# Altium PCB MezzanineBreakout.PcbDoc
Units mil, origin at the board's own origin, x right, y up, seen from the top; angles counter-clockwise.
Board outline 600 x 950 mil, 2 copper layers (Top Layer, Bottom Layer); 1 components, 50 nets, 104 pads, 26 vias.
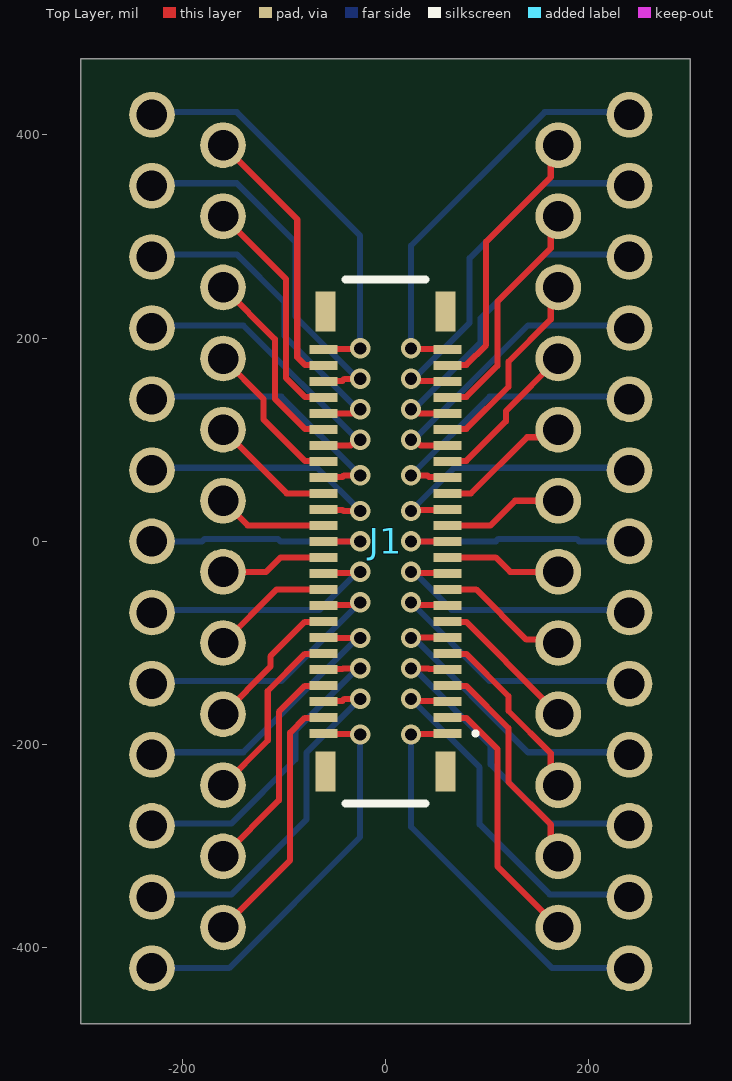
[diagram p0: Top Layer view]
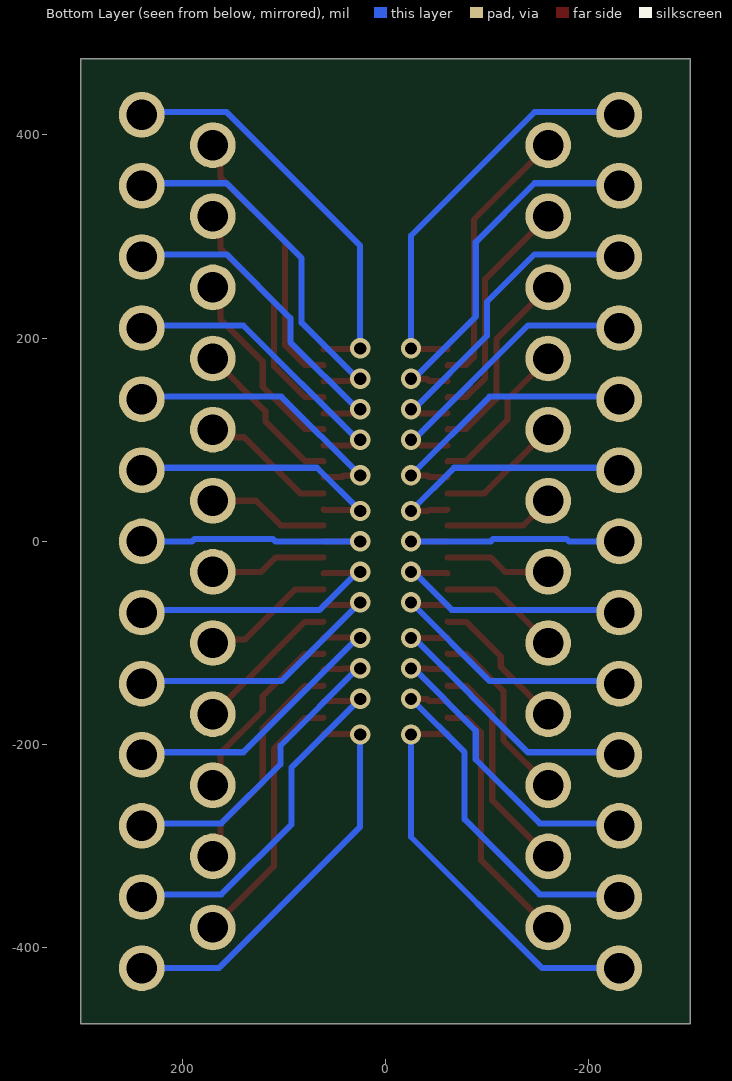
[diagram p1: Bottom Layer view, seen from below]

## Layer stack, top to bottom
Top Solder: solder mask 0.4, Solder Resist, Dk 3.5
Top Layer: signal copper 1.4
Dielectric 1: dielectric 12.6, FR-4, Dk 4.8
Bottom Layer: signal copper 1.4
Bottom Solder: solder mask 0.4, Solder Resist, Dk 3.5

## Board outline
-300,-475 -300,475 300,475 300,-475

## Design rules (kind name [scope] priority, off if disabled: settings)
Clearance [All] p1: gap=10 ignorepadtopadclearanceinfootprint=FALSE except(0: Arc-Hole Track-Hole SMDPad-Hole THPad-Hole Via-Hole Fill-Hole Poly-Hole Region-Hole Text-Hole; 5: Arc-Arc Arc-Track Track-Track SMDPad-SMDPad; 7: Arc-THPad Track-THPad; 8: Arc-SMDPad Track-SMDPad; 20: SMDPad-THPad)
HoleSize [All] p1: absolutevalues=TRUE maxlimit=248.03 minlimit=0.98 maxpercent=80.000 minpercent=20.000
MinimumSolderMaskSliver [All] p1: minsoldermaskwidth=3.15
PlaneClearance [All] p1: clearance=5
PlaneConnect [All] p1: planeconnectstyle=Direct reliefexpansion=20 reliefentries=4 reliefconductorwidth=10 reliefairgap=10
PolygonConnect PolygonConnect_5V [InNet('+5')] p1: connectstyle=Direct reliefconductorwidth=10 reliefentries=4 polygonreliefangle="90 Angle" airgapwidth=10
PolygonConnect PolygonConnect_VCC [InNet('VCC')] p2: connectstyle=Direct reliefconductorwidth=10 reliefentries=4 polygonreliefangle="90 Angle" airgapwidth=10
PolygonConnect PolygonConnect_GND [InNet('GND')] p3: thpad.connectstyle=Direct thpad.reliefconductorwidth=10 thpad.reliefentries=4 thpad.polygonreliefangle="90 Angle" thpad.airgapwidth=10 smdpad.connectstyle=Relief smdpad.reliefconductorwidth=10 smdpad.reliefentries=4 smdpad.polygonreliefangle="90 Angle" smdpad.airgapwidth=10 via.connectstyle=Direct via.reliefconductorwidth=10 via.reliefentries=4 via.polygonreliefangle="90 Angle" via.airgapwidth=10
PolygonConnect [All] p4: connectstyle=Relief reliefconductorwidth=10 reliefentries=4 polygonreliefangle="90 Angle" airgapwidth=10
RoutingVias [All] p1: holewidth=28 width=50 viastyle="Through Hole" minholewidth=12 minwidth=20 maxholewidth=28 maxwidth=50
SolderMaskExpansion SolderMaskExpansion_Connector [HasFootprint('501745-0501')] p1: expansion=3.7 istentingtop=FALSE
SolderMaskExpansion [All] p2: expansion=2 istentingtop=FALSE
Width [All] p1: maxlimit=100 minlimit=5 preferedwidth=10 minimp=50.000000 maximp=50.000000 favimp=50.000000
26 further rules are at their usual default settings.

## Components (designator, comment, footprint, x,y, rotation, side; value= is the part's Value field where it differs from the comment)
J1 "51338-1074" 51338-1074 0,0 r90 top

## Footprints (in the part's own frame and the unit in brackets; to place one, negate y for a bottom-side part, rotate by r counter-clockwise, add the part's x,y. Pads: shape width x height; smd on the part's side, far side on the other; paste and mask are expansions set on the pad)
51338-1074 [mm]
  rect 0.22x0.7 smd: 1(-4.8,-1.55) 2(-4.8,1.55) 3(-4.4,-1.55) 4(-4.4,1.55) 5(-4,-1.55) 6(-4,1.55) 7(-3.6,-1.55) 8(-3.6,1.55) 9(-3.2,-1.55) 10(-3.2,1.55) 11(-2.8,-1.55) 12(-2.8,1.55) 13(-2.4,-1.55) 14(-2.4,1.55) 15(-2,-1.55) 16(-2,1.55) 17(-1.6,-1.55) 18(-1.6,1.55) 19(-1.2,-1.55) 20(-1.2,1.55) 21(-0.8,-1.55) 22(-0.8,1.55) 23(-0.4,-1.55) 24(-0.4,1.55) 25(0,-1.55) 26(0,1.55) 27(0.4,-1.55) 28(0.4,1.55) 29(0.8,-1.55) 30(0.8,1.55) 31(1.2,-1.55) 32(1.2,1.55) 33(1.6,-1.55) 34(1.6,1.55) 35(2,-1.55) 36(2,1.55) 37(2.4,-1.55) 38(2.4,1.55) 39(2.8,-1.55) 40(2.8,1.55) 41(3.2,-1.55) 42(3.2,1.55) 43(3.6,-1.55) 44(3.6,1.55) 45(4,-1.55) 46(4,1.55) 47(4.4,-1.55) 48(4.4,1.55) 49(4.8,-1.55) 50(4.8,1.55)
  rect 1x0.5 smd: MP1(-5.75,-1.5) MP2(-5.75,1.5) MP3(5.75,-1.5) MP4(5.75,1.5)
  silkscreen extent -6.55,-2.3 6.55,1, body extent -6.55,-1.7 6.55,1.7, height 1.33

## Part data
J1: "Board Connector, 100 Contact(s), 2 Row(s), Female, Straight, 0.016 inch Pitch, Surface Mount Terminal, Locking, Black Insulator, Receptacle", Contact Resistance=40mR, Flammability Rating="UL94 V-0", Insulation Color=Black, Insulation Resistance=100MR, Manufacturer=Molex, Max Operating Temperature=85°C, Min Operating Temperature=-25°C, Rated Current (Signal)=300mA, Supplier Part Number=538-51338-1074, Board Mounting Option="FITTING NAIL", Body Breadth=0.134inch, Body Depth=0.053inch, Body Length=0.909inch, Body/Shell Style=RECEPTACLE, Category="Headers and Wire Housings", ComponentLink1Description=https://datasheet.ciiva.com:443/pdfs/VipMasterIC/IC/MOLE/MOLE-S-A0003536377/MOLE-S-A0003536377-1.pdf?src-supplier=IHS+Markit, ComponentLink1URL=https://datasheet.ciiva.com:443/pdfs/VipMasterIC/IC/MOLE/MOLE-S-A0003536377/MOLE-S-A0003536377-1.pdf?src-supplier=IHS+Markit, ComponentLink2Description=https://datasheet.ciiva.com/5129/0513381074-pcb-receptacles-149270-5129725.pdf?src-supplier=Mouser, ComponentLink2URL=https://datasheet.ciiva.com/5129/0513381074-pcb-receptacles-149270-5129725.pdf?src-supplier=Mouser, ComponentLink3Description=https://datasheet.ciiva.com/46409/1597556-46409754.pdf?src-supplier=Element14, ComponentLink3URL=https://datasheet.ciiva.com/46409/1597556-46409754.pdf?src-supplier=Element14, Connector Type="BOARD CONNECTOR", Contact Finish - Mating=GOLD, Contact Finish - Termination=GOLD, Contact Gender=Female, Contact Pattern=RECTANGULAR, DIN Conformance=No, Filter Feature=No, IEC Conformance=No, Insulation Material=Polymer, JESD-609 Code=e4, Manufacturer Part Number=51338-1074, Mating Contact Pitch=0.016inch, Mating Contact Row Spacing=0.043inch, Mating Information="MULTIPLE MATING PARTS AVAILABLE", MIL Conformance=No, Mixed Contacts=No, Mounting Option 1=LOCKING, Mounting Style=STRAIGHT, Mounting Technology=Board, Number Of Connectors=1, Number of Contacts=100, Number Of PCB Rows=2, Number of Rows Loaded=2, Option="General Purpose", PCB Contact Pattern=RECTANGULAR, PCB Contact Row Spacing=1.4986mm, Pricing="1=3.42, 10=3.08, 50=3.08, 100=2.57, 500=2.56, 1000=2.27, 10000=2.27 (USD)", Reach SVHC Compliant=Yes, Reference Standard=UL, Reliability=COMMERCIAL, RoHS=Yes, RoHS Compliant=Yes, Stock=1434, Supplier=Mouser, Terminal Pitch=0.4mm, Termination=SMD/SMT

## Free pads (board coordinates)
  round 45 hole 30: 1(240,-420) 2(-230,-420) 3(170,-380) 4(-160,-380) 5(240,-350) 6(-230,-350) 7(170,-310) 8(-160,-310) 9(240,-280) 10(-230,-280) 11(170,-240) 12(-160,-240) 13(240,-210) 14(-230,-210) 15(170,-170) 16(-160,-170) 17(240,-140) 18(-230,-140) 19(170,-100) 20(-160,-100) 21(240,-70) 22(-230,-70) 23(170,-30) 24(-160,-30) 25(240,0) 26(-230,0) 27(170,40) 28(-160,40) 29(240,70) 30(-230,70) 31(170,110) 32(-160,110) 33(240,140) 34(-230,140) 35(170,180) 36(-160,180) 37(240,210) 38(-230,210) 39(170,250) 40(-160,250) 41(240,280) 42(-230,280) 43(170,320) 44(-160,320) 45(240,350) 46(-230,350) 47(170,390) 48(-160,390) 49(240,420) 50(-230,420)

## Via types
v1: diameter 20, hole 12, Top Layer to Bottom Layer, 26 vias

## Nets (pads, with @x,y where several pads share a name; then routed paths per layer and width w, separated by ;. In a path a pad name is that pad's centre, name@x,y a point inside that pad or via, vN(x,y) a via of type N, cw(c..) or ccw(c..) an arc to the next point about the centre after c; other vN are vias at no path point)
1: J1.1 pad.1 | length 400
  Top Layer w6: v1(25,-190) 25.51,-189.49 60.51,-189.49 J1.1
  Bottom Layer w6: v1(25,-190) 25,-280.96 164.04,-420 pad.1
2: J1.2 pad.2 | length 395.9
  Top Layer w6: J1.2 -60.51,-189.49 -25.51,-189.49 v1(-25,-190)
  Bottom Layer w6: pad.2 -154.04,-420 -25,-290.96 v1(-25,-190)
3: J1.3 pad.3 | length 262.4
  Top Layer w6: J1.3 61.44,-173.65 79.36,-173.65 109.95,-204.23 109.95,-319.95 pad.3
4: J1.4 pad.4 | length 258.3
  Top Layer w6: pad.4 -93.95,-313.95 -93.95,-188.23 -79.36,-173.65 -61.44,-173.65 J1.4
5: J1.5 pad.5 | length 365.6
  Top Layer w6: v1(25,-155) 27.06,-157.06 60.61,-157.06 J1.5
  Bottom Layer w6: v1(25,-155) 92.46,-222.46 92.46,-278.42 161.54,-347.5 237.5,-347.5 pad.5
6: J1.6 pad.6 | length 361.5
  Top Layer w6: J1.6 -60.61,-157.06 -42.69,-157.06 -40.62,-155 v1(-25,-155)
  Bottom Layer w6: pad.6 -227.5,-347.5 -151.54,-347.5 -77.71,-273.67 -77.71,-207.71 v1(-25,-155)
7: J1.7 pad.7 | length 223.9
  Top Layer w6: J1.7 61.44,-142.15 79.36,-142.15 120.95,-183.74 120.95,-236.91 162.54,-278.5 162.54,-302.54 pad.7
8: J1.8 pad.8 | length 219.8
  Top Layer w6: pad.8 -104.95,-254.95 -104.95,-167.74 -79.36,-142.15 -61.44,-142.15 J1.8
9: J1.9 pad.9 | length 326.5
  Top Layer w6: v1(25,-125) 42.12,-125 42.69,-125.57 60.61,-125.57 J1.9
  Bottom Layer w6: v1(25,-125) 27.53,-125 103.46,-200.93 103.46,-219.42 161.54,-277.5 237.5,-277.5 pad.9
10: J1.10 pad.10 | length 322.3
  Top Layer w6: J1.10 -60.61,-125.57 -42.69,-125.57 -42.12,-125 v1(-25,-125)
  Bottom Layer w6: pad.10 -227.5,-277.5 -151.54,-277.5 -88.71,-214.67 -88.71,-186.18 -27.53,-125 v1(-25,-125)
11: J1.11 pad.11 | length 185.4
  Top Layer w6: J1.11 61.44,-110.65 79.36,-110.65 120.95,-152.24 120.95,-166.91 162.54,-208.5 162.54,-232.54 pad.11
12: J1.12 pad.12 | length 181.3
  Top Layer w6: pad.12 -115.95,-195.95 -115.95,-147.24 -79.36,-110.65 -61.44,-110.65 J1.12
13: J1.13 pad.13 | length 298.9
  Top Layer w6: v1(25,-95) 25.26,-94.74 60.77,-94.74 J1.13
  Bottom Layer w6: v1(25,-95) 27.53,-95 140.03,-207.5 237.5,-207.5 pad.13
14: J1.14 pad.14 | length 288.9
  Top Layer w6: J1.14 -60.61,-94.91 -42.69,-94.91 -42.59,-95 v1(-25,-95)
  Bottom Layer w6: pad.14 -227.5,-207.5 -140.03,-207.5 -27.53,-95 v1(-25,-95)
15: J1.15 pad.15 | length 146.9
  Top Layer w6: J1.15 61.44,-79.16 79.36,-79.16 118.31,-118.11 118.31,-118.31 pad.15
16: J1.16 pad.16 | length 142.8
  Top Layer w6: pad.16 -113.31,-123.31 -113.31,-113.11 -79.36,-79.16 -61.44,-79.16 J1.16
17: J1.17 pad.17 | length 285.4
  Top Layer w6: v1(25,-60) 27.57,-62.57 60.61,-62.57 J1.17
  Bottom Layer w6: v1(25,-60) 102.5,-137.5 237.5,-137.5 pad.17
18: J1.18 pad.18 | length 275.4
  Top Layer w6: J1.18 -60.61,-62.57 -27.57,-62.57 v1(-25,-60)
  Bottom Layer w6: pad.18 -227.5,-137.5 -102.5,-137.5 v1(-25,-60)
19: J1.19 pad.19 | length 130.8
  Top Layer w6: J1.19 89.04,-47.24 138.5,-96.71 166.71,-96.71 pad.19
20: J1.20 pad.20 | length 120.8
  Top Layer w6: pad.20 -107.24,-47.24 J1.20
21: J1.21 pad.21 | length 268.2
  Top Layer w6: v1(25,-30) 26.08,-31.08 60.61,-31.08 J1.21
  Bottom Layer w6: v1(25,-30) 27.53,-30 65.03,-67.5 237.5,-67.5 pad.21
22: J1.22 pad.22 | length 258.2
  Top Layer w6: J1.22 -60.61,-31.08 -26.08,-31.08 v1(-25,-30)
  Bottom Layer w6: pad.22 -227.5,-67.5 -65.03,-67.5 -27.53,-30 v1(-25,-30)
23: J1.23 pad.23 | length 114.9
  Top Layer w6: J1.23 108.29,-15.75 122.54,-30 pad.23
24: J1.24 pad.24 | length 104.9
  Top Layer w6: pad.24 -117.54,-30 -103.29,-15.75 J1.24
25: J1.25 pad.25 | length 253.1
  Top Layer w6: v1(25,0) J1.25
  Bottom Layer w6: v1(25,0) 108.49,0 110.99,2.5 188.01,2.5 190.51,0 pad.25
26: J1.26 pad.26 | length 243.1
  Top Layer w6: J1.26 v1(-25,0)
  Bottom Layer w6: pad.26 -180.51,0 -178.01,2.5 -105.99,2.5 -103.49,0 v1(-25,0)
27: J1.27 pad.27 | length 119
  Top Layer w6: J1.27 103.29,15.75 127.54,40 pad.27
28: J1.28 pad.28 | length 109
  Top Layer w6: pad.28 -135.75,15.75 J1.28
29: J1.29 pad.29 | length 270.3
  Top Layer w6: v1(25,30) 26.08,31.08 60.61,31.08 J1.29
  Bottom Layer w6: v1(25,30) 67.5,72.5 237.5,72.5 pad.29
30: J1.30 pad.30 | length 260.3
  Top Layer w6: J1.30 -60.61,31.08 -42.69,31.08 -41.61,30 v1(-25,30)
  Bottom Layer w6: pad.30 -227.5,72.5 -67.5,72.5 v1(-25,30)
31: J1.31 pad.31 | length 135
  Top Layer w6: J1.31 84.04,47.24 139.33,102.54 162.54,102.54 pad.31
32: J1.32 pad.32 | length 125
  Top Layer w6: pad.32 -97.24,47.24 J1.32
33: J1.33 pad.33 | length 285
  Top Layer w6: v1(25,65) 41.1,65 42.69,63.41 60.61,63.41 J1.33
  Bottom Layer w6: v1(25,65) 102.5,142.5 237.5,142.5 pad.33
34: J1.34 pad.34 | length 275
  Top Layer w6: J1.34 -60.61,63.41 -42.69,63.41 -41.1,65 v1(-25,65)
  Bottom Layer w6: pad.34 -227.5,142.5 -102.5,142.5 v1(-25,65)
35: J1.35 pad.35 | length 156.9
  Top Layer w6: J1.35 61.44,79.16 79.36,79.16 118.31,118.11 118.31,128.31 pad.35
36: J1.36 pad.36 | length 152.8
  Top Layer w6: pad.36 -120,140 -120,119.8 -79.36,79.16 -61.44,79.16 J1.36
37: J1.37 pad.37 | length 300.9
  Top Layer w6: v1(25,100) 28.79,100 34.3,94.49 J1.37
  Bottom Layer w6: v1(25,100) 27.53,100 140.03,212.5 237.5,212.5 pad.37
38: J1.38 pad.38 | length 290.9
  Top Layer w6: J1.38 -34.3,94.49 -28.79,100 v1(-25,100)
  Bottom Layer w6: pad.38 -227.5,212.5 -140.03,212.5 -27.53,100 v1(-25,100)
39: J1.39 pad.39 | length 195.4
  Top Layer w6: J1.39 61.44,110.65 79.36,110.65 120.95,152.24 120.95,176.91 162.54,218.5 162.54,242.54 pad.39
40: J1.40 pad.40 | length 191.3
  Top Layer w6: pad.40 -109,199 -109,140.29 -79.36,110.65 -61.44,110.65 J1.40
41: J1.41 pad.41 | length 330.6
  Top Layer w6: v1(25,130) 28.79,130 32.8,125.98 J1.41
  Bottom Layer w6: v1(25,130) 27.53,130 93.69,196.16 93.69,219.65 156.54,282.5 237.5,282.5 pad.41
42: J1.42 pad.42 | length 326.5
  Top Layer w6: J1.42 -32.8,125.98 -28.79,130 v1(-25,130)
  Bottom Layer w6: pad.42 -227.5,282.5 -146.54,282.5 -99.69,235.65 -99.69,202.16 -27.53,130 v1(-25,130)
43: J1.43 pad.43 | length 233.9
  Top Layer w6: J1.43 61.44,142.15 79.36,142.15 109.95,172.74 109.95,235.91 162.54,288.5 162.54,312.54 pad.43
44: J1.44 pad.44 | length 229.8
  Top Layer w6: pad.44 -98,258 -98,160.79 -79.36,142.15 -61.44,142.15 J1.44
45: J1.45 pad.45 | length 370
  Top Layer w6: v1(25,160) 27.1,157.9 60.61,157.9 J1.45
  Bottom Layer w6: v1(25,160) 27.53,160 82.69,215.16 82.69,278.65 156.54,352.5 237.5,352.5 pad.45
46: J1.46 pad.46 | length 365.9
  Top Layer w6: J1.46 -60.61,157.9 -42.69,157.9 -40.59,160 v1(-25,160)
  Bottom Layer w6: pad.46 -227.5,352.5 -146.54,352.5 -88.69,294.65 -88.69,221.16 -27.53,160 v1(-25,160)
47: J1.47 pad.47 | length 272.4
  Top Layer w6: J1.47 61.44,173.65 79.36,173.65 98.95,193.23 98.95,294.91 162.54,358.5 162.54,382.54 pad.47
48: J1.48 pad.48 | length 268.3
  Top Layer w6: pad.48 -87,317 -87,181.29 -79.36,173.65 -61.44,173.65 J1.48
49: J1.49 pad.49 | length 407.9
  Top Layer w6: v1(25,190) 25.51,189.49 60.51,189.49 J1.49
  Bottom Layer w6: v1(25,190) 25,290.96 156.54,422.5 237.5,422.5 pad.49
50: J1.50 pad.50 | length 403.8
  Top Layer w6: J1.50 -60.51,189.49 -25.51,189.49 v1(-25,190)
  Bottom Layer w6: pad.50 -227.5,422.5 -146.54,422.5 -25,300.96 v1(-25,190)
pads on no net: J1.MP1 J1.MP2 J1.MP3 J1.MP4

## Silkscreen, mask and mechanical layers (free items; w line width, h text height)
Mechanical 1:
  the board outline again, w10